# Altium PCB PX4FMUv1.6.PcbDoc (part 1 of 2)
Units mil, origin at the board's own origin, x right, y up, seen from the top; angles counter-clockwise.
Board outline 1968.5 x 1417.32 mil, 4 copper layers (Top, Route2, Route15, Bottom), stack 57.482 mil thick; 118 components, 107 nets, 504 pads, 254 vias.
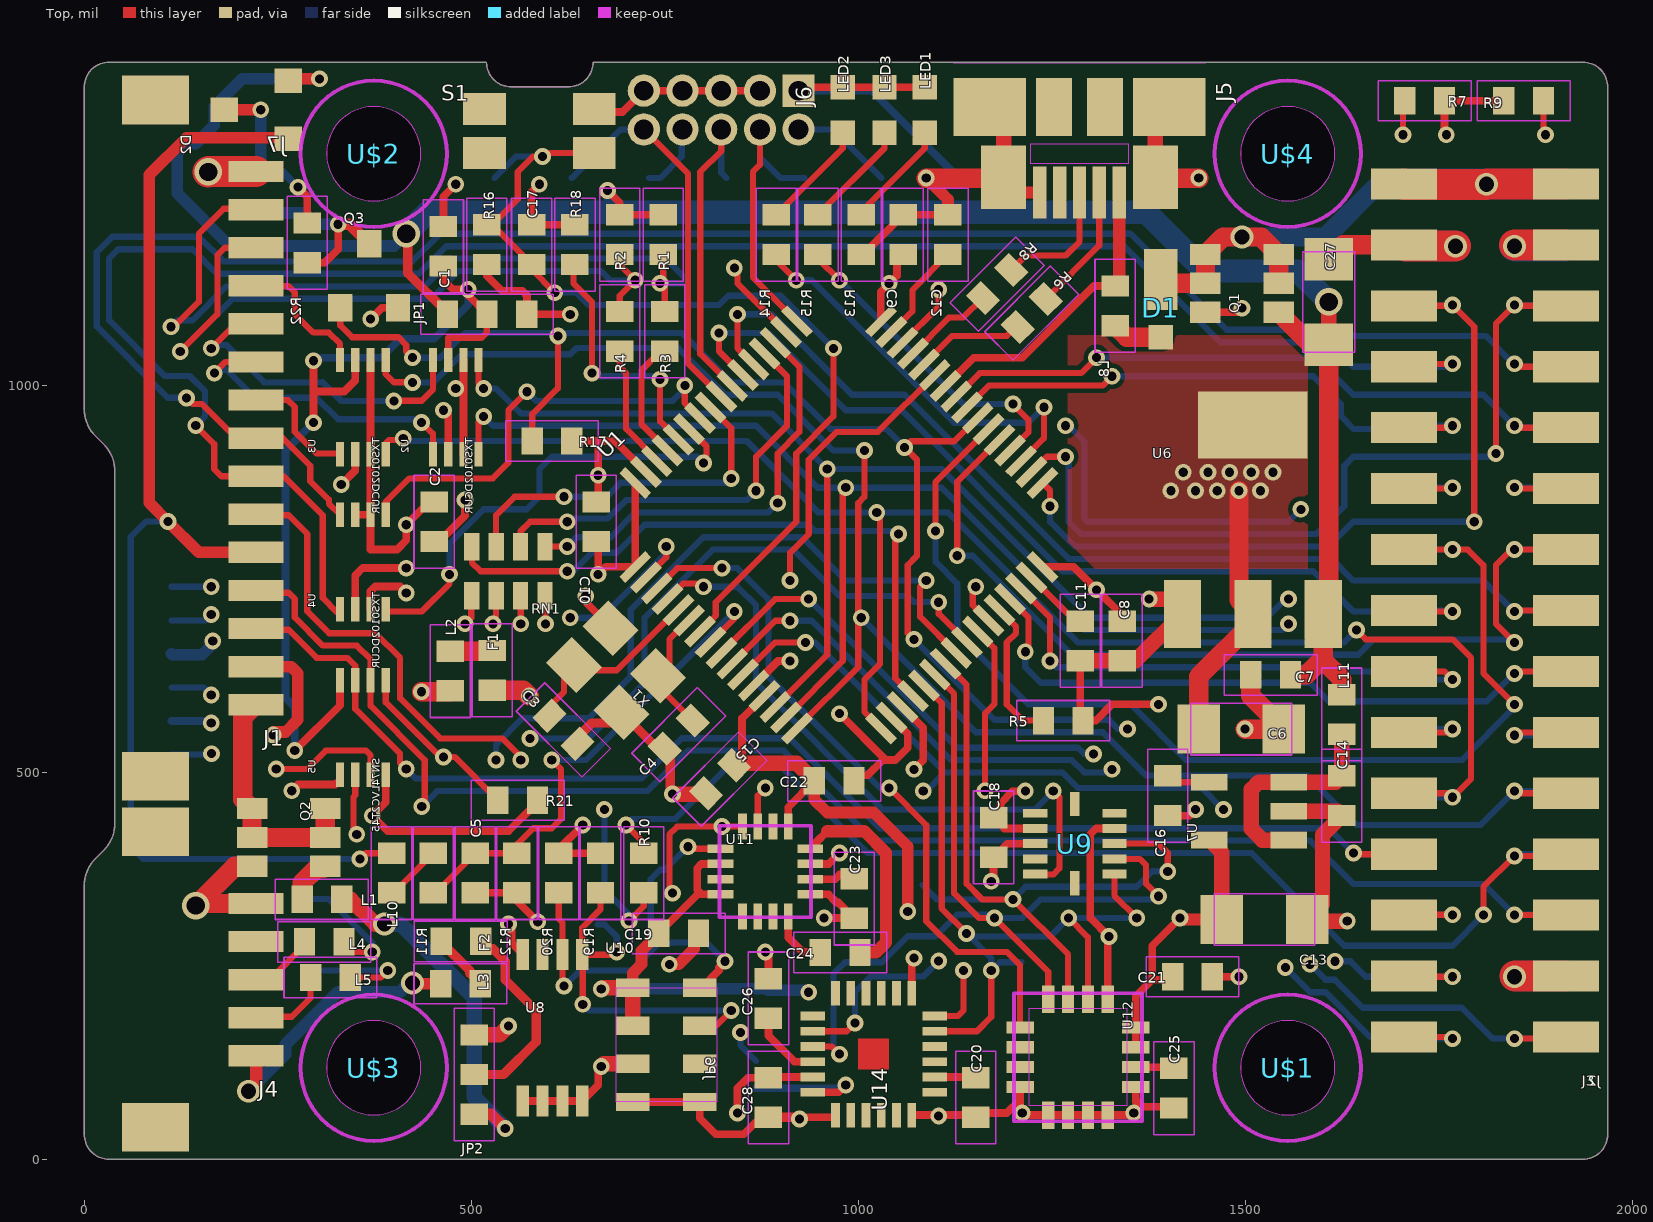
[diagram p0: Top view]
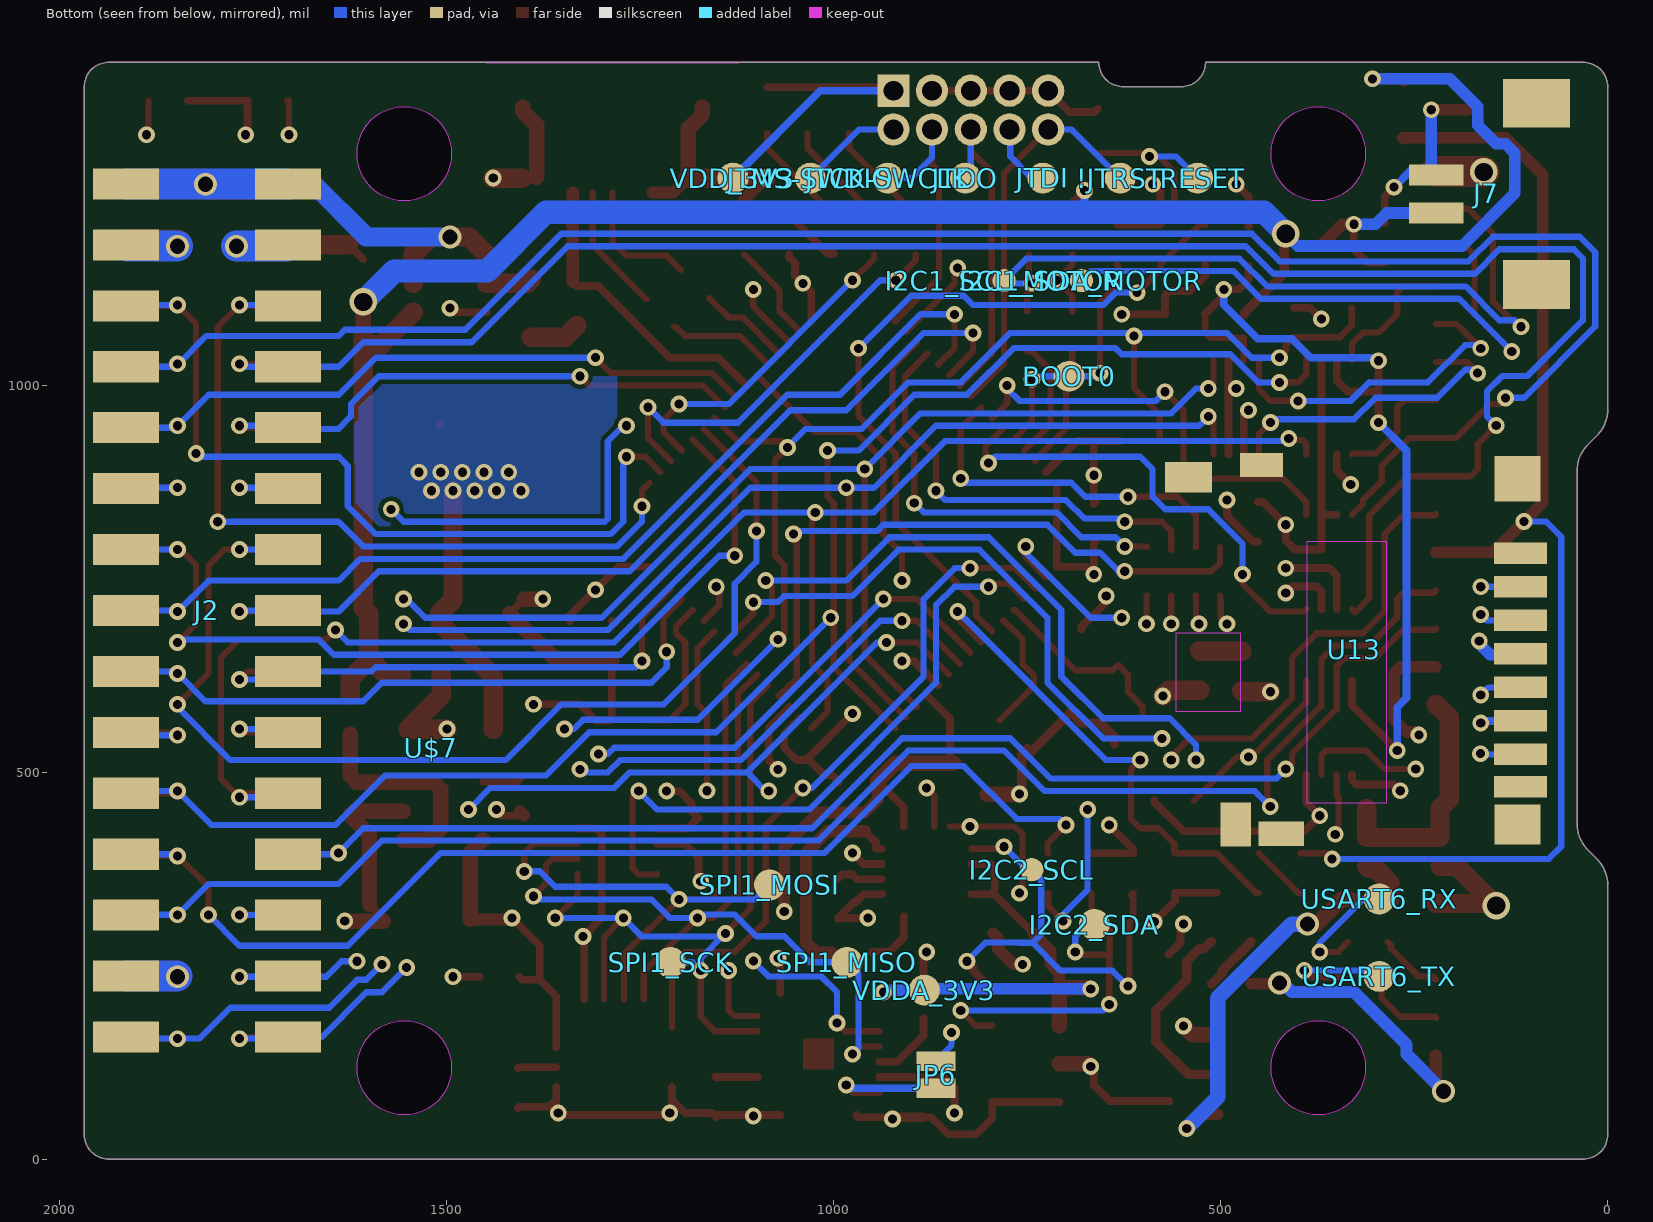
[diagram p1: Bottom view, seen from below]
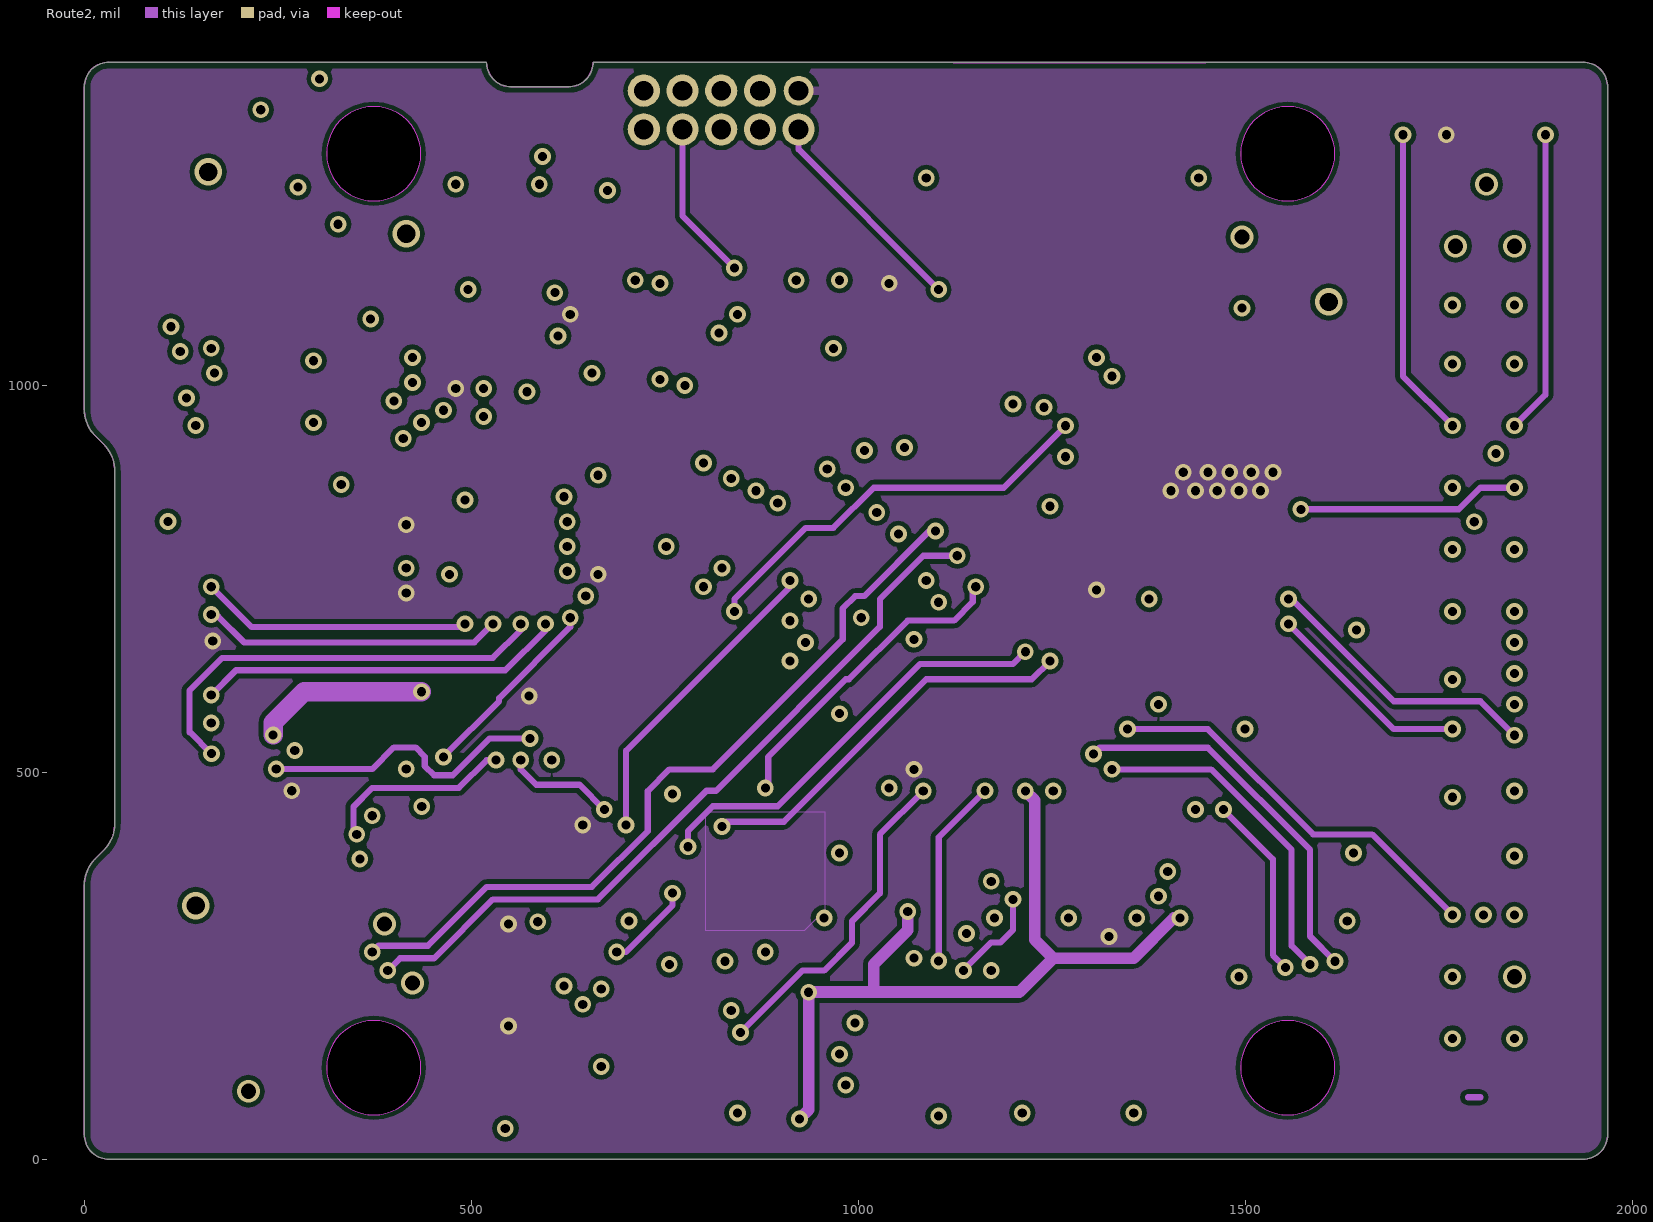
[diagram p2: Route2]
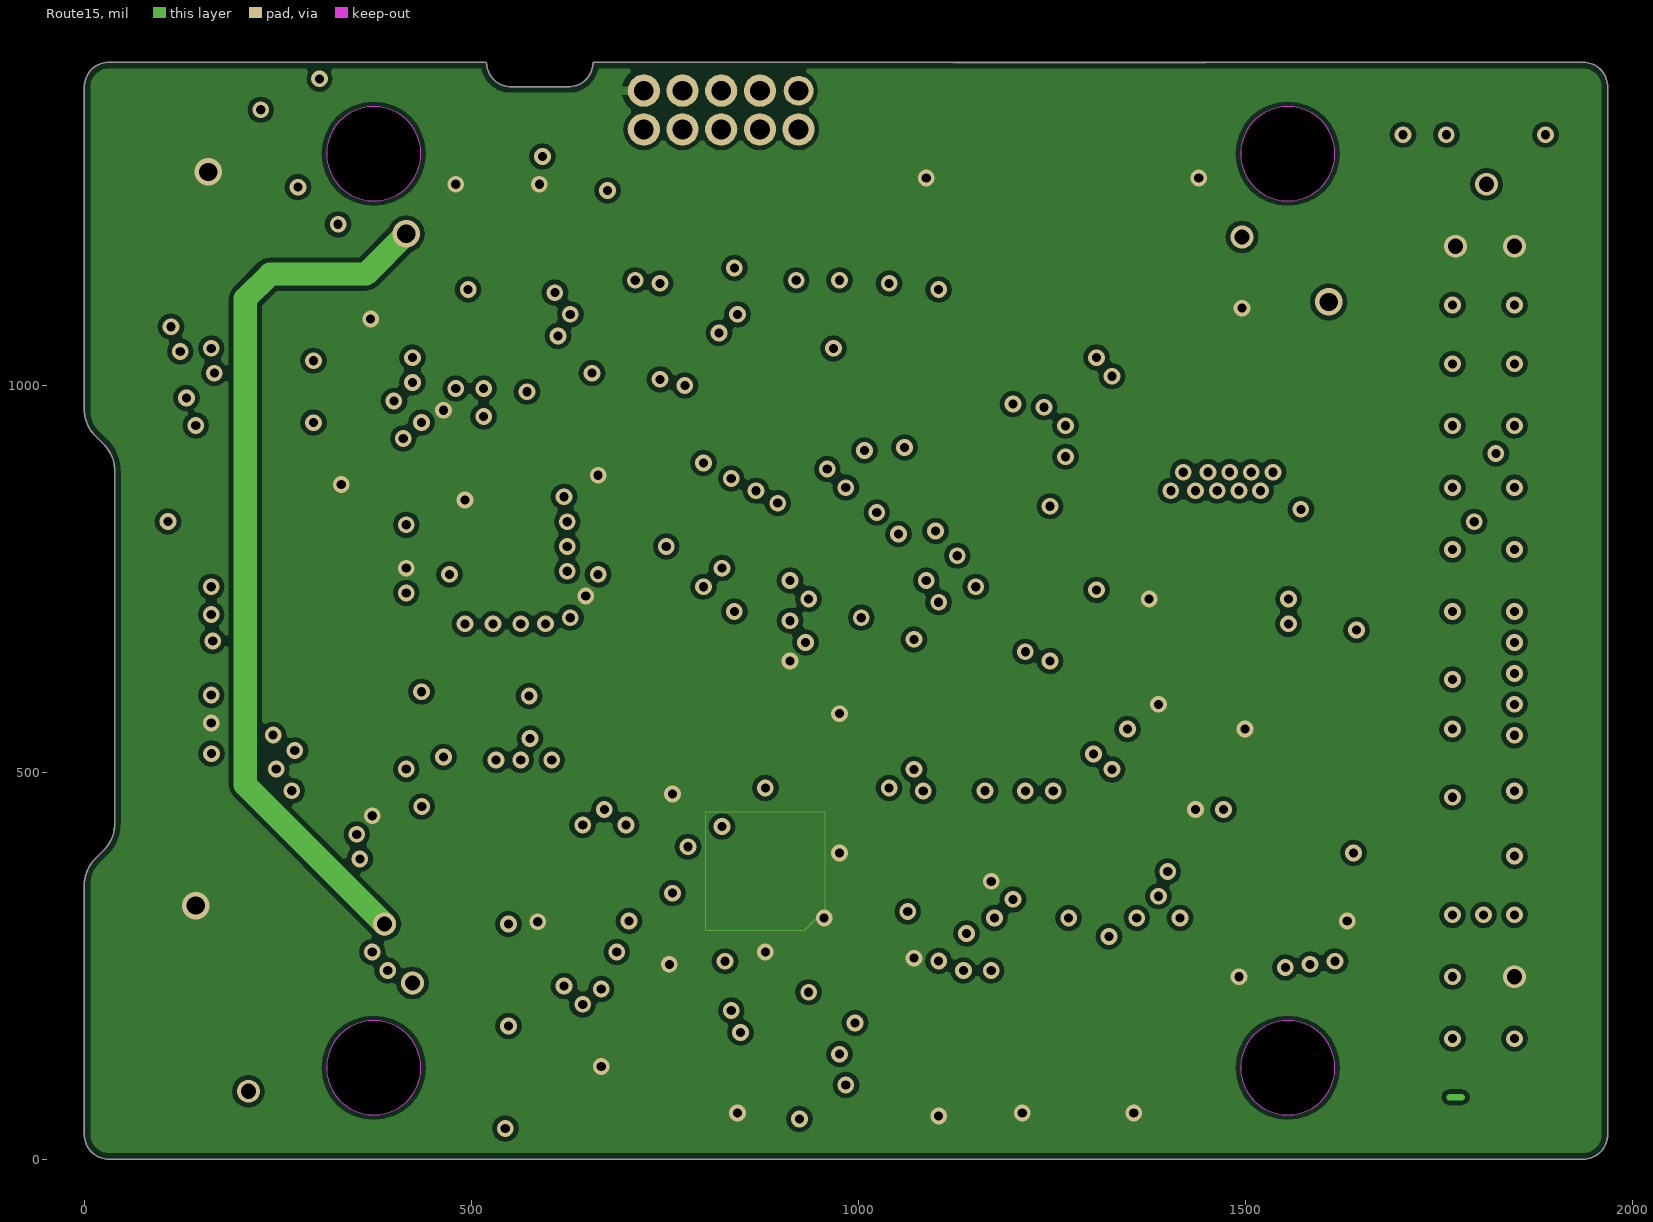
[diagram p3: Route15]

## Layer stack, top to bottom
Top Solder: solder mask 0.4, Solder Resist, Dk 3.5
Top: signal copper 1.378
Dielectric 1: core 19.685, FR-4, Dk 4.8
Route2: signal copper 1.378
Dielectric2: core 19.685, FR-4, Dk 4.8
Route15: signal copper 1.378
Dielectric3: dielectric 12.6, FR-4, Dk 4.8
Bottom: signal copper 1.378
Bottom Solder: solder mask 0.4, Solder Resist, Dk 3.5

## Board outline
39.37,432.96 39.37,889.88 ccw(c-7.88,889.88) 25.53,923.29 13.84,934.98 cw(c47.25,968.39) 0,968.39 0,1385.83 cw(c31.5,1385.83) 31.5,1417.32 519.68,1417.32 ccw(c551.17,1417.33) 551.18,1385.83 625.98,1385.83 ccw(c625.99,1417.33) 657.48,1417.32 1937.01,1417.32 cw(c1937.01,1385.83) 1968.5,1385.83 1968.5,31.5 cw(c1937.01,31.5) 1937.01,0 31.5,0 cw(c31.5,31.5) 0,31.5 0,354.44 cw(c47.25,354.44) 13.84,387.85 25.53,399.55 ccw(c-7.88,432.96)
cut-out: 1122.61,1416.46 1449.39,1416.46
cut-out: 1555.12,57.09 ccw(c1555.12,118.11) 1616.14,118.11 ccw(c1555.12,118.11) 1555.12,179.13 ccw(c1555.12,118.11) 1494.1,118.11 ccw(c1555.12,118.11)
cut-out: 374.02,1238.18 ccw(c374.02,1299.21) 435.05,1299.21 ccw(c374.02,1299.21) 374.02,1360.23 ccw(c374.02,1299.21) 313,1299.21 ccw(c374.02,1299.21)
cut-out: 1555.12,1238.18 ccw(c1555.12,1299.21) 1616.14,1299.21 ccw(c1555.12,1299.21) 1555.12,1360.23 ccw(c1555.12,1299.21) 1494.1,1299.21 ccw(c1555.12,1299.21)
cut-out: 374.02,57.09 ccw(c374.02,118.11) 435.05,118.11 ccw(c374.02,118.11) 374.02,179.13 ccw(c374.02,118.11) 313,118.11 ccw(c374.02,118.11)

## Design rules (kind name [scope] priority, off if disabled: settings)
BoardOutlineClearance mdCopperDimension [All] p1: gap=10 ignorepadtopadclearanceinfootprint=FALSE except(0: Arc-SplitContinuation Track-SplitContinuation SMDPad-SplitContinuation THPad-SplitContinuation Via-SplitContinuation Fill-SplitContinuation Poly-SplitContinuation Region-SplitContinuation Text-SplitContinuation; 7.87: Poly-OutlineEdge Poly-CavityEdge Poly-CutoutEdge Poly-SplitBarrior)
Clearance "Clearance (Same Net)" [All] p1: gap=5.91 ignorepadtopadclearanceinfootprint=FALSE
Clearance Clearance_for_NetClass_power [InNetClass('power') vs InNetClass('power')] p2: gap=8 ignorepadtopadclearanceinfootprint=FALSE
Clearance [All] p3: gap=5.91 ignorepadtopadclearanceinfootprint=FALSE
HoleSize HoleSize_For_NetClass_power [InNetClass('power')] p1: absolutevalues=TRUE maxlimit=11.81 minlimit=11.81 maxpercent=80.000 minpercent=20.000
HoleSize [All] p2: absolutevalues=TRUE maxlimit=100000 minlimit=11.81 maxpercent=80.000 minpercent=20.000
HoleToHoleClearance mdDrill [All] p1: gap=7.87 allowstackedmicrovias=TRUE
MinimumSolderMaskSliver [All] p1 off: minsoldermaskwidth=10
PasteMaskExpansion Expansion_SMDPaste_OFF [InPadClass('SMDPaste_OFF')] p1: expansion=0
PasteMaskExpansion mlMinCreamFrame [All] p2: expansion=-1
PolygonConnect PolygonConnect_For_PolygonThermal_ON_Width118100_Gap80000 [InPolygonClass('PolygonThermal_ON_Width118100_Gap80000') vs Not IsVia] p1: connectstyle=Relief reliefconductorwidth=11.81 reliefentries=4 polygonreliefangle="90 Angle" airgapwidth=8
PolygonConnect PolygonConnect_For_PolygonThermal_ON_Width100000_Gap80000 [InPolygonClass('PolygonThermal_ON_Width100000_Gap80000') vs Not IsVia] p2: connectstyle=Relief reliefconductorwidth=10 reliefentries=4 polygonreliefangle="90 Angle" airgapwidth=8
PolygonConnect PolygonConnect_For_PolygonThermal_ON_Width80000_Gap80000 [InPolygonClass('PolygonThermal_ON_Width80000_Gap80000') vs Not IsVia] p3: connectstyle=Relief reliefconductorwidth=8 reliefentries=4 polygonreliefangle="90 Angle" airgapwidth=8
PolygonConnect PolygonConnect_For_PolygonThermal_OFF [InPolygonClass('PolygonThermal_OFF')] p4: connectstyle=Direct reliefconductorwidth=10 reliefentries=4 polygonreliefangle="90 Angle" airgapwidth=10
PolygonConnect ThermalVias [IsVia] p5: connectstyle=Direct reliefconductorwidth=10 reliefentries=4 polygonreliefangle="90 Angle" airgapwidth=10
PolygonConnect [All] p6: connectstyle=Relief reliefconductorwidth=10 reliefentries=4 polygonreliefangle="90 Angle" airgapwidth=10
RoutingVias [All] p1: holewidth=11.81 width=21.65 viastyle="Through Hole" minholewidth=11.81 minwidth=21.65 maxholewidth=100 maxwidth=100
SolderMaskExpansion Expansion_SMDSolder_OFF [InPadClass('SMDSolder_OFF')] p1: expansion=0 istentingtop=FALSE
SolderMaskExpansion mlMinStopFrame [All] p2: expansion=1 istentingtop=FALSE
Width Width_For_NetClass_power [InNetClass('power')] p1: maxlimit=10 minlimit=10 preferedwidth=10
Width [All] p2: maxlimit=10000 minlimit=5.91 preferedwidth=5.91
26 further rules are at their usual default settings.

## Classes and differential pairs
polygon class PolygonThermal_ON_Width100000_Gap80000: Polygon_1_Net_GND Polygon_1_Net_POLY1 Polygon_1_Net_POLY2 Polygon_1_Net_VDD_3V3
polygon class PolygonThermal_ON_Width80000_Gap80000: Polygon_3_Net_VDD_3V3
polygon class PolygonThermal_OFF: Polygon_2_Net_VDD_3V3
pad class SMDSolder_OFF: RN1-1 RN1-2 RN1-3 RN1-4 RN1-5 RN1-6 RN1-7 RN1-8
pad class SMDPaste_OFF: !JTRST-P$1 !RESET-P$1 BOOT0-P$1 I2C1_SCL_MOTOR-P$1 I2C1_SDA_MOTOR-P$1 I2C2_SCL-P$1 I2C2_SDA-P$1 JP1-3 JP2-3 JP6-1 JP6-2 JTCK-SWCLK-P$1 JTDI-P$1 JTDO-P$1 JTMS-SWDIO-P$1 SPI1_MISO-P$1 SPI1_MOSI-P$1 SPI1_SCK-P$1 USART6_RX-P$1 USART6_TX-P$1 VDD_3V3-P$1 VDDA_3V3-P$1
net class power: GND N$23 N$24 N$27 N$100 VBUS VDD_3V3 VDD_3V3_ANALOG VDD_5V VDD_5V_IN VDD_IO

## Components (designator, comment, footprint, x,y, rotation, side; value= is the part's Value field where it differs from the comment)
!JTRST "" PAD.04X.04 629.92,1267.65 r225 bottom
!RESET "" PAD.04X.04 529.92,1267.65 r225 bottom
BOOT0 "" PAD.04X.04 696,1011.69 r180 bottom
C1 "0u1" 0402-CAP 464,1179.69 r90 top
C2 "0u1" 0402-CAP 452,823.68 r270 top
C3 "8p" 0402-CAP 619.07,554.76 r315 top
C4 "8p" 0402-CAP 768.07,548.61 r45 top
C5 "0u1" 0402-CAP 505,369.69 r270 top
C6 "10u" EIA3216 1495,555.68 r180 top
C7 "0u1" 0402-CAP 1533,625.68 r180 top
C8 "0u1" 0402-CAP 1341,669.68 r270 top
C9 "0u1" 0402-CAP 1058,1194.69 r90 top
C10 "0u1" 0402-CAP 661.39,823.68 r90 top
C11 "2u2" 0402-CAP 1287,669.68 r270 top
C12 "2u2" 0402-CAP 1116,1194.69 r90 top
C13 "10u" EIA3216 1525,309.69 r180 top
C14 "0u1" 0402-CAP 1625,469.69 r270 top
C15 "0u1" 0402-CAP 821.32,491.01 r225 top
C16 "470p" 0402-CAP 1400,469.69 r270 top
C17 "0u1" 0402-CAP 578,1181.69 r270 top
C18 "0u1" 0402-CAP 1175,415.69 r270 top
C19 "0u1" 0402-CAP 768,291.69 r0 top
C20 "0u01" 0402-CAP 1152,79.69 r270 top
C21 "0u1" 0402-CAP 1432,235.69 r0 top
C22 "0u1" 0402-CAP 969,488.69 r0 top
C23 "4u7" 0402-CAP 995,336.69 r270 top
C24 "0u22" 0402-CAP 976.69,267 r0 top
C25 "0u01" 0402-CAP 1408,91.69 r270 top
C26 "2u2" 0402-CAP 884,207.69 r90 top
C27 "10u" EIA3216 1608,1107.69 r270 top
C28 "2u2" 0402-CAP 884,79.69 r90 top
D1 "MSS1P4-M3" MICROSMP 1391,1087.69 r270 top
D2 "BAT54C" SOT23-3 224,1356 r90 top
F1 "500mA" 0402-PTC 527.24,631.65 r90 top
F2 "200mA" 0402-PTC 486.62,281.29 r180 top
I2C1_SCL_MOTOR "" PAD.03X.03 779.95,1135.31 r180 bottom
I2C1_SDA_MOTOR "" PAD.03X.03 679.95,1135.31 r180 bottom
I2C2_SCL "" PAD.03X.03 744.22,374.02 r180 bottom
I2C2_SDA "" PAD.04X.04 663.39,303.15 r180 bottom
J1 "DF13-15P-1.25H" DF13A-15P-1.25H 92,931.69 r90 top
J2 "HEADER_2X15-REV" HEADER_2MM_2X15_REVERSE 1810,708.98 r270 bottom
J3 "HEADER_2X15" HEADER_2MM_2X15 1810,708.98 r90 top
J4 "DF13-5P-1.25H" DF13A-5P-1.25H 92,232 r90 top
J5 "47346-0001" MOLEX-47346-0001 1286,1359.37 r270 top
J6 "" FTSH-105-01-XXX-DV 923,1380.69 r180 top
J7 "DF13-2P-1.25H" DF13A-2P-1.25H 91.69,1248 r270 bottom
JP1 "0R" SJ_3_0603_PASTE1&2 546,1091.69 r180 top
JP2 "0R" SJ_3_0603_PASTE1&2 504,83.69 r90 top
JP6 "JUMPER-2" SJ_2 868,91.69 r270 bottom
JTCK-SWCLK "" PAD.04X.04 930.32,1267.65 r225 bottom
JTDI "" PAD.04X.04 729.92,1267.65 r225 bottom
JTDO "" PAD.04X.04 829.92,1267.65 r225 bottom
JTMS-SWDIO "" PAD.04X.04 1030.32,1267.65 r225 bottom
L1 "FERRITE" 0402-IND 307,335.69 r180 top
L2 "FERRITE" 0402-IND 473,630.68 r270 top
L3 "FERRITE" 0402-IND 486,226.69 r180 top
L4 "BLM15HD102SN1" 0402-IND 310,280.69 r180 top
L5 "BLM15HD102SN1" 0402-IND 318,234.69 r180 top
L8 "FERRITE" 0402-IND 1332,1102.69 r90 top
L10 "BLM15HD102SN1" 0402-IND 397,369.69 r90 top
L11 "FERRITE" 0402-IND 1625,574.68 r270 top
LED1 "GREEN" LED-0603 1086,1355.69 r180 top
LED2 "AMBER" LED-0603 980,1355.69 r180 top
LED3 "BLUE" LED-0603 1034,1355.69 r180 top
Q1 "NTGS4111P" TSOP-6@1 1496,1131.69 r270 top
Q2 "NTGS4111P" TSOP-6@1 264,415.69 r270 top
Q3 "ZXMS6004FFTA" SOT23-3 368,1139.69 r0 top
R1 "1K5" 0402-RES 748,1194.69 r90 top
R2 "1K5" 0402-RES 692,1194.69 r90 top
R3 "100" 0402-RES 750,1069.69 r90 top
R4 "100" 0402-RES 692,1069.69 r90 top
R5 "10K" 0402-RES 1265,566.68 r0 top
R6 "22R" 0402-RES 1224.26,1093.32 r225 top
R7 "1K5" 0402-RES 1732,1367.69 r0 top
R8 "22R" 0402-RES 1179.53,1130.73 r225 top
R9 "1K5" 0402-RES 1860,1367.69 r180 top
R10 "1K0" 0402-RES 723,369.69 r270 top
R11 "47K/0.1%" 0402-RES 451,369.69 r90 top
R12 "10K/0.1%" 0402-RES 559,369.69 r90 top
R13 "270R" 0402-RES 1004,1194.69 r90 top
R14 "270R" 0402-RES 894,1194.69 r90 top
R15 "82R" 0402-RES 948,1194.69 r90 top
R16 "10K" 0402-RES 520,1181.69 r270 top
R17 "10K" 0402-RES 604.32,928 r180 top
R18 "10K" 0402-RES 634,1181.69 r270 top
R19 "1K5" 0402-RES 667,369.69 r90 top
R20 "1K5" 0402-RES 613,369.69 r90 top
R21 "10K" 0402-RES 560,463.69 r180 top
R22 "10K" 0402-RES 288,1184 r90 top
RN1 "CTS742C083" CTS742C083 548,759.68 r180 top
S1 "RESET" EVQP7J01K 588,1328.69 r180 top
SPI1_MISO "" PAD.04X.04 982.99,254.33 r225 bottom
SPI1_MOSI "" PAD.04X.04 1082.99,354.33 r180 bottom
SPI1_SCK "" PAD.04X.04 1210.99,254.33 r225 bottom
U1 "STM32F405RGT6" TQFP64 975,819.68 r45 top
U2 "TXS0102DCUR" TI-DCU 480,971.69 r0 top
U3 "TXS0102DCUR" TI-DCU 360,971.69 r0 top
U4 "TXS0102DCUR" TI-DCU 360,771.68 r0 top
U5 "SN74LVC2T45" TI-DCU 360,557.68 r0 top
U6 "LD1117AS33" SOT-223 1510,826.68 r0 top
U7 "MIC5207" SOT23-5 1505,449.69 r90 top
U8 "128KBit EEPROM" MSOP-8 605,169.69 r0 top
U9 "" LGA12 1280,407.69 r0 top
U10 "MS5611-01BA" MS5611-01BA 752,147.69 r0 top
U11 "HMC5883L" HMC5883L-MAN 880,371.69 r0 top
U12 "L3GD20" L3G4200DH-MAN 1284,131.69 r270 top
U13 "" AMPHENOL_114-00841-68 152,479.69 r90 bottom
U14 "MPU-6000" QFN-24 1020,135.69 r270 top
U$1 "" MOUNT-HOLE3.1 1555.12,118.11 r0 top
U$2 "" MOUNT-HOLE3.1 374.02,1299.21 r0 top
U$3 "" MOUNT-HOLE3.1 374.02,118.11 r0 top
U$4 "" MOUNT-HOLE3.1 1555.12,1299.21 r0 top
U$7 "" OSHW-LOGO-S 1520,531.68 r180 bottom
USART6_RX "" PAD.04X.04 295.28,336.22 r180 bottom
USART6_TX "" PAD.04X.04 295.28,236.22 r180 bottom
VDD_3V3 "" PAD.04X.04 1130.32,1267.65 r225 bottom
VDDA_3V3 "" PAD.04X.04 882.99,218.33 r180 bottom
X1 "24 MHz 3.2x2.5mm 8-10pf" OSCILLATOR-3.2X2.5 687,631.68 r135 top

## Footprints (in the part's own frame and the unit in brackets; to place one, negate y for a bottom-side part, rotate by r counter-clockwise, add the part's x,y. Pads: shape width x height; smd on the part's side, far side on the other; paste and mask are expansions set on the pad)
0402-CAP [mm] "0402-CAP"
  rect 0.7x0.9 smd: 1(-0.65,0) 2(0.65,0)
  Top keep-out lines w0.051: -1.524,0.66 -1.524,-0.66 1.524,-0.66 1.524,0.66 -1.524,0.66
0402-IND [mm] "0402-IND"
  rect 0.7x0.9 smd: 1(-0.65,0) 2(0.65,0)
  Top keep-out lines w0.051: 1.524,0.66 1.524,-0.66 -1.524,-0.66 -1.524,0.66 1.524,0.66
0402-PTC [mm] "0402-PTC"
  rect 0.7x0.9 smd: 1(-0.65,0) 2(0.65,0)
  Top keep-out lines w0.051: -1.524,0.66 -1.524,-0.66 1.524,-0.66 1.524,0.66 -1.524,0.66
0402-RES [mm] "0402-RES"
  rect 0.7x0.9 smd: 1(-0.65,0) 2(0.65,0)
  Top keep-out lines w0.051: -1.524,0.66 -1.524,-0.66 1.524,-0.66 1.524,0.66 -1.524,0.66
AMPHENOL_114-00841-68 [mm] "AMPHENOL_114-00841-68"
  rect 0.7x1.75 smd: P$1(7.7,-1) P$2(6.6,-1) P$3(5.5,-1) P$4(4.4,-1) P$5(3.3,-1) P$6(2.2,-1) P$7(1.1,-1) P$8(0.04,-1)
  rect 1.5x1.5 smd: P$9(10.15,-0.9)
  rect 1.3x1.5 smd: P$10(-1.2,-0.9)
  rect 0.8x1.5 smd: P$11(-1.5,6.85)
  rect 1.45x1 smd: P$12(-1.2,8.35)
  rect 0.8x1.4 smd: P$13(10.6,7.5)
  rect 1x1.55 smd: P$14(10.2,9.9)
  Top keep-out region: -0.5,3.4 -0.5,6 8.1,6 8.1,3.4
  Top keep-out region: 2.5,8.2 2.5,10.3 5.1,10.3 5.1,8.2
CTS742C083 [mil] "CTS742C083"
  rect 19.69x35.43 smd mask+0: 1(-47.24,-31.5) 2(-15.75,-31.5) 3(15.75,-31.5) 4(47.24,-31.5) 5(47.24,31.5) 6(15.75,31.5) 7(-15.75,31.5) 8(-47.24,31.5)
DF13A-2P-1.25H [mil] "DF13A-2P-1.25H"
  rect 27.56x70.87 smd: 1(-23.82,-129.92) 2(25.39,-129.92)
  rect 62.99x86.61 smd: S1(117.91,0) S2(-116.34,0)
DF13A-5P-1.25H [mil] "DF13A-5P-1.25H"
  rect 27.56x70.87 smd: 1(-98.43,-129.92) 2(-49.21,-129.92) 3(0,-129.92) 4(49.21,-129.92) 5(98.43,-129.92)
  rect 62.99x86.61 smd: S1(190.94,0) S2(-190.94,0)
DF13A-15P-1.25H [mm] "DF13A-15P-1.25H"
  rect 0.7x1.8 smd: 1(-8.75,-3.3) 2(-7.5,-3.3) 3(-6.25,-3.3) 4(-5,-3.3) 5(-3.75,-3.3) 6(-2.5,-3.3) 7(-1.25,-3.3) 8(0,-3.3) 9(1.25,-3.3) 10(2.5,-3.3) 11(3.75,-3.3) 12(5,-3.3) 13(6.25,-3.3) 14(7.5,-3.3) 15(8.75,-3.3)
  rect 1.6x2.2 smd: S1(11.1,0) S2(-11.1,0)
EIA3216 [mil] "EIA3216"
  rect 55.12x62.99 smd: A(55.12,0) C(-55.12,0)
  Top keep-out lines w1.97: 64.96,33.46 64.96,-33.46 -64.96,-33.46 -64.96,33.46 64.96,33.46
EVQP7J01K [mil] "EVQP7J01K"
  rect 55.12x41.34 smd: A1(-70.87,28.54) A2(70.87,28.54) B3(-70.87,-28.54) B4(70.87,-28.54)
FTSH-105-01-XXX-DV [mm] "FTSH-105-01-XXX-DV"
  rect 1.06x1.06 / inner round 0.979 / far side rect 1.06x1.06 hole 0.65: 1(0,0)
  round 1.06 hole 0.65: 2(0,1.27) 3(1.27,0) 4(1.27,1.27) 5(2.54,0) 6(2.54,1.27) 7(3.81,0) 8(3.81,1.27) 9(5.08,0) 10(5.08,1.27)
HEADER_2MM_2X15 [mm] "HEADER_2MM_2X15"
  rect 1.02x2.16 smd: 1(14,-2.655) 2(14,2.655) 3(12,-2.655) 4(12,2.655) 5(10,-2.655) 6(10,2.655) 7(8,-2.655) 8(8,2.655) 9(6,-2.655) 10(6,2.655) 11(4,-2.655) 12(4,2.655) 13(2,-2.655) 14(2,2.655) 15(0,-2.655) 16(0,2.655) 17(-2,-2.655) 18(-2,2.655) 19(-4,-2.655) 20(-4,2.655) 21(-6,-2.655) 22(-6,2.655) 23(-8,-2.655) 24(-8,2.655) 25(-10,-2.655) 26(-10,2.655) 27(-12,-2.655) 28(-12,2.655) 29(-14,-2.655) 30(-14,2.655)
HEADER_2MM_2X15_REVERSE [mm] "HEADER_2MM_2X15_REVERSE"
  rect 1.02x2.16 smd: 1(-14,-2.655) 2(-14,2.655) 3(-12,-2.655) 4(-12,2.655) 5(-10,-2.655) 6(-10,2.655) 7(-8,-2.655) 8(-8,2.655) 9(-6,-2.655) 10(-6,2.655) 11(-4,-2.655) 12(-4,2.655) 13(-2,-2.655) 14(-2,2.655) 15(0,-2.655) 16(0,2.655) 17(2,-2.655) 18(2,2.655) 19(4,-2.655) 20(4,2.655) 21(6,-2.655) 22(6,2.655) 23(8,-2.655) 24(8,2.655) 25(10,-2.655) 26(10,2.655) 27(12,-2.655) 28(12,2.655) 29(14,-2.655) 30(14,2.655)
HMC5883L-MAN [mm] "HMC5883L-MAN"
  rect 0.85x0.285 smd: 1(-1.475,0.75) 2(-1.475,0.25) 3(-1.475,-0.25) 4(-1.475,-0.75) 9(1.475,-0.75) 10(1.475,-0.25) 11(1.475,0.25) 12(1.475,0.75)
  rect 0.285x0.85 smd: 5(-0.75,-1.475) 6(-0.25,-1.475) 7(0.25,-1.475) 8(0.75,-1.475) 13(0.75,1.475) 14(0.25,1.475) 15(-0.25,1.475) 16(-0.75,1.475)
  Top keep-out lines w0.127: -1.5,-1.5 -1.5,1.5 1.5,1.5 1.5,-1.5 -1.5,-1.5
L3G4200DH-MAN [mil] "L3G4200DH-MAN"
  rect 35.43x15.75 smd: 1(-74.8,38.39) 2(-74.8,12.8) 3(-74.8,-12.8) 4(-74.8,-38.39) 9(74.8,-38.39) 10(74.8,-12.8) 11(74.8,12.8) 12(74.8,38.39)
  rect 15.75x35.43 smd: 5(-38.39,-74.8) 6(-12.8,-74.8) 7(12.8,-74.8) 8(38.39,-74.8) 13(38.39,74.8) 14(12.8,74.8) 15(-12.8,74.8) 16(-38.39,74.8)
  Top keep-out region: -62.99,-62.99 -62.99,62.99 62.99,62.99 62.99,-62.99
  Top keep-out lines w5: 82.68,-82.68 -82.68,-82.68 -82.68,82.68 82.68,82.68 82.68,-82.68
LED-0603 [mil] "LED-0603"
  rect 31.5x31.5 smd: A(0,-29.53) C(0,29.53)
LGA12 [mil] "LGA12"
  rect 31.5x11.42 smd: 1(-51.18,39.37) 2(-51.18,19.69) 3(-51.18,0) 4(-51.18,-19.69) 5(-51.18,-39.37) 7(51.18,-39.37) 8(51.18,-19.69) 9(51.18,0) 10(51.18,19.69) 11(51.18,39.37)
  rect 12.6x31.5 smd: 6(0,-51.18) 12(0,51.18)
MICROSMP [mil] "MICROSMP"
  rect 31.5x31.5 smd: ANODE(25.59,0)
  rect 78.74x43.31 smd: CATHODE(-49.21,0)
MOLEX-47346-0001 [mm] "MOLEX-47346-0001"
  rect 1.7x0.44 smd: D+(2.8,0) D-(2.8,0.65) GND(2.8,-1.3) ID(2.8,-0.65) VBUS(2.8,1.3)
  rect 1.9x2.375 smd: GND1(0,2.95) GND4(0,-2.95)
  rect 2.1x1.475 smd: GND2(2.3,2.5) GND3(2.3,-2.5)
  rect 1.9x1.175 smd: GND5(0,-0.837) GND6(0,0.837)
  Top keep-out region: 1.2,-1.6 1.2,1.6 1.85,1.6 1.85,-1.6
MOUNT-HOLE3.1 [mil] "MOUNT-HOLE3.1"
  Top keep-out circle w5: c0,0 r94.49
MS5611-01BA [mil] "MS5611-01BA"
  rect 43.31x23.62 smd: 1(-43.31,73.82) 2(-43.31,24.61) 3(-43.31,-24.61) 4(-43.31,-73.82) 5(43.31,-73.82) 6(43.31,-24.61) 7(43.31,24.61) 8(43.31,73.82)
  Top keep-out region: -64.96,-73.82 -64.96,73.82 64.96,73.82 64.96,-73.82
MSOP-8 [mil] "MSOP-8"
  rect 15.75x40.16 smd: 1(-38.39,-94.49) 2(-12.8,-94.49) 3(12.8,-94.49) 4(38.39,-94.49) 5(38.39,94.49) 6(12.8,94.49) 7(-12.8,94.49) 8(-38.39,94.49)
OSCILLATOR-3.2X2.5 [mil] "OSCILLATOR-3.2X2.5"
  rect 55.12x47.24 smd: 1(-43.31,-33.46) 2(43.31,-33.46) 3(43.31,33.46) 4(-43.31,33.46)
OSHW-LOGO-S [mil] "OSHW-LOGO-S"
PAD.03X.03 [mil] "PAD.03X.03"
  rrect100% 30x30 smd paste+0: P$1(0,0)
PAD.04X.04 [mil] "PAD.04X.04"
  rrect100% 40x40 smd paste+0: P$1(0,0)
QFN-24 [mil] "QFN-24"
  rect 31.5x11.42 smd: 1(-78.74,49.21) 2(-78.74,29.53) 3(-78.74,9.84) 4(-78.74,-9.84) 5(-78.74,-29.53) 6(-78.74,-49.21) 13(78.74,-49.21) 14(78.74,-29.53) 15(78.74,-9.84) 16(78.74,9.84) 17(78.74,29.53) 18(78.74,49.21)
  rect 11.42x31.5 smd: 7(-49.21,-78.74) 8(-29.53,-78.74) 9(-9.84,-78.74) 10(9.84,-78.74) 11(29.53,-78.74) 12(49.21,-78.74) 19(49.21,78.74) 20(29.53,78.74) 21(9.84,78.74) 22(-9.84,78.74) 23(-29.53,78.74) 24(-49.21,78.74)
  Top region: -19.69,-19.69 -19.69,19.69 19.69,19.69 19.69,-19.69
SJ_2 [mil] "SJ_2"
  rect 25x50 smd paste+0: 1(-35,0) 2(0,0)
SJ_3_0603_PASTE1&2 [mm] "SJ_3_0603_PASTE1&2"
  rect 0.7x0.9 smd: 1(-0.65,0) 2(0.65,0)
  rect 0.7x0.9 smd paste+0: 3(1.95,0)
  Top keep-out lines w0.051: 2.824,0.66 2.824,-0.66 -1.524,-0.66 -1.524,0.66 2.824,0.66
SOT23-3 [mil] "SOT23-3"
  rect 31.5x35.43 smd: 1(-37.4,-39.37) 2(37.4,-39.37) 3(0,43.31)
SOT23-5 [mil] "SOT23-5"
  rect 21.65x47.24 smd: 1(-37.4,-51.19) 2(0,-51.19) 3(37.4,-51.19) 4(37.4,51.19) 5(-37.4,51.19)
SOT-223 [mil] "SOT-223"
  rect 48x88 smd: 1(-91,-122) 2(0,-122) 3(91,-122)
  rect 141.73x86.61 smd: 4(0,122.01)
TI-DCU [mil] "TI-DCU"
  rect 10.63x31.5 smd: 1(-29.53,-61.02) 2(-9.84,-61.02) 3(9.84,-61.02) 4(29.53,-61.02) 5(29.53,61.02) 6(9.84,61.02) 7(-9.84,61.02) 8(-29.53,61.02)
TQFP64 [mm] "TQFP64"
  rect 1.2x0.29 smd: 1(-5.7,3.75) 2(-5.7,3.25) 3(-5.7,2.75) 4(-5.7,2.25) 5(-5.7,1.75) 6(-5.7,1.25) 7(-5.7,0.75) 8(-5.7,0.25) 9(-5.7,-0.25) 10(-5.7,-0.75) 11(-5.7,-1.25) 12(-5.7,-1.75) 13(-5.7,-2.25) 14(-5.7,-2.75) 15(-5.7,-3.25) 16(-5.7,-3.75) 33(5.7,-3.75) 34(5.7,-3.25) 35(5.7,-2.75) 36(5.7,-2.25) 37(5.7,-1.75) 38(5.7,-1.25) 39(5.7,-0.75) 40(5.7,-0.25) 41(5.7,0.25) 42(5.7,0.75) 43(5.7,1.25) 44(5.7,1.75) 45(5.7,2.25) 46(5.7,2.75) 47(5.7,3.25) 48(5.7,3.75)
  rect 0.29x1.2 smd: 17(-3.75,-5.7) 18(-3.25,-5.7) 19(-2.75,-5.7) 20(-2.25,-5.7) 21(-1.75,-5.7) 22(-1.25,-5.7) 23(-0.75,-5.7) 24(-0.25,-5.7) 25(0.25,-5.7) 26(0.75,-5.7) 27(1.25,-5.7) 28(1.75,-5.7) 29(2.25,-5.7) 30(2.75,-5.7) 31(3.25,-5.7) 32(3.75,-5.7) 49(3.75,5.7) 50(3.25,5.7) 51(2.75,5.7) 52(2.25,5.7) 53(1.75,5.7) 54(1.25,5.7) 55(0.75,5.7) 56(0.25,5.7) 57(-0.25,5.7) 58(-0.75,5.7) 59(-1.25,5.7) 60(-1.75,5.7) 61(-2.25,5.7) 62(-2.75,5.7) 63(-3.25,5.7) 64(-3.75,5.7)
TSOP-6@1 [mm] "TSOP-6@1"
  rect 0.7x1 smd: 1(-0.95,-1.2) 2(0,-1.2) 3(0.95,-1.2) 4(0.95,1.2) 5(0,1.2) 6(-0.95,1.2)

## Part data
!JTRST !RESET BOOT0 I2C2_SDA JTCK-SWCLK JTDI JTDO JTMS-SWDIO SPI1_MISO SPI1_MOSI SPI1_SCK USART6_RX USART6_TX VDD_3V3 VDDA_3V3: library part PAD.04X.04, PackageName=PAD.04X.04
C1 C2 C3 C4 C5 C7 C8 C9 C10 C11 C12 C14 C15 C16 C17 C18 C19 C20 C21 C22 C23 C24 C25 C26 C28: library part 0402-CAP, PackageName=0402-CAP
C6 C13 C27: library part EIA3216, PackageName=EIA3216
D1: library part MICROSMP, PackageName=MICROSMP
D2 Q3: library part SOT23-3, PackageName=SOT23-3
F1 F2: library part 0402-PTC, PackageName=0402-PTC
I2C1_SCL_MOTOR I2C1_SDA_MOTOR I2C2_SCL: library part PAD.03X.03, PackageName=PAD.03X.03
J1: library part DF13A-15P-1.25H, PackageName=DF13A-15P-1.25H
J2: library part HEADER_2MM_2X15_REVERSE, PackageName=HEADER_2MM_2X15_REVERSE
J3: library part HEADER_2MM_2X15, PackageName=HEADER_2MM_2X15
J4: library part DF13A-5P-1.25H, PackageName=DF13A-5P-1.25H
J5: library part MOLEX-47346-0001, PackageName=MOLEX-47346-0001
J6: library part FTSH-105-01-XXX-DV, PackageName=FTSH-105-01-XXX-DV
J7: library part DF13A-2P-1.25H, PackageName=DF13A-2P-1.25H
JP1 JP2: library part SJ_3_0603_PASTE1&2, PackageName=SJ_3_0603_PASTE1&2
JP6: library part SJ_2, PackageName=SJ_2
L1 L2 L3 L4 L5 L8 L10 L11: library part 0402-IND, PackageName=0402-IND
LED1 LED2 LED3: library part LED-0603, PackageName=LED-0603
Q1 Q2: library part TSOP-6@1, PackageName=TSOP-6@1
R1 R2 R3 R4 R5 R6 R7 R8 R9 R10 R11 R12 R13 R14 R15 R16 R17 R18 R19 R20 R21 R22: library part 0402-RES, PackageName=0402-RES
S1: library part EVQP7J01K, PackageName=EVQP7J01K
U1: library part TQFP64, PackageName=TQFP64
U2 U3 U4 U5: library part TI-DCU, PackageName=TI-DCU
U6: library part SOT-223, PackageName=SOT-223
U7: library part SOT23-5, PackageName=SOT23-5
U8: library part MSOP-8, PackageName=MSOP-8
U9: library part LGA12, PackageName=LGA12
U11: library part HMC5883L-MAN, PackageName=HMC5883L-MAN
U12: library part L3G4200DH-MAN, PackageName=L3G4200DH-MAN
U13: library part AMPHENOL_114-00841-68, PackageName=AMPHENOL_114-00841-68
U14: library part QFN-24, PackageName=QFN-24
U$1 U$2 U$3 U$4: library part MOUNT-HOLE3.1, PackageName=MOUNT-HOLE3.1
U$7: library part OSHW-LOGO-S, PackageName=OSHW-LOGO-S
X1: library part OSCILLATOR-3.2X2.5, PackageName=OSCILLATOR-3.2X2.5
RN1: PackageName=CTS742C083
U10: PackageName=MS5611-01BA

## Free pads (board coordinates)
  round 122.05 hole 122.05 unplated: MH1(374.02,118.11) MH1(374.02,1299.21) MH1(1555.12,118.11) MH1(1555.12,1299.21)

## Via types
v1: diameter 21.65/21.65/21.65/21.65 (per signal layer), hole 11.81, Top to Bottom, 242 vias
v2: diameter 29.54/29.54/29.54/29.54 (per signal layer), hole 19.69, Top to Bottom, 8 vias
v3: diameter 35.43/35.43/35.43/35.43 (per signal layer), hole 23.62, Top to Bottom, 4 vias

## Nets (pads, with @x,y where several pads share a name; then routed paths per layer and width w, separated by ;. In a path a pad name is that pad's centre, name@x,y a point inside that pad or via, vN(x,y) a via of type N, cw(c..) or ccw(c..) an arc to the next point about the centre after c; other vN are vias at no path point)
!JTRST: !JTRST.P$1 J6.10 U1.56 | length 506.1
  Top w8: J6.10@723,1330.69 780,1273.69 780,1028.6 U1.56@823.28,985.32
  Bottom w8: !JTRST.P$1@629.92,1267.65 692.95,1330.69 J6.10@723,1330.69
ACCEL_CS: U1.4 U9.5 | length 834.1
  Top w8: U1.4@753.68,723.63 773.73,743.68 796,743.68 v1(800,739.68) ; U9.5@1228.82,368.32 1229.45,367.69 1252,367.69 1260,375.69 1260,467.69 v1(1252,475.69)
  Bottom w8: v1(800,739.68) 844,739.68 868,715.68 868,615.68 1032,451.69 1228,451.69 v1(1252,475.69)
ADC123_IN10: C5.1 J2.11 J3.11 R11.1 R12.2 U1.8 | length 2039.2
  Top w8: R11.1@451,344.1 453.82,344.09 C5.1@505,395.28 R12.2@559,395.28 560,396.28 560,407.69 580,427.69 604,427.69 616,439.69 616,503.69 v1(604,515.68) ; U1.8@809.36,667.96 840,698.6 v1(840,707.68) ; v1(1848,867.69) 1849.23,866.46 J3.11@1914.53,866.46
  Route2 w8: v1(840,707.68) 840,723.68 932,815.68 968,815.68 1020,867.69 1188,867.69 v1(1268,947.69) ; v1(1572,839.69) 1776,839.69 1804,867.69 v1(1848,867.69)
  Bottom w8: v1(604,515.68) 648,515.68 v1(840,707.68) ; v1(1268,947.69) 1272,947.69 1292,927.69 1292,827.68 1296,823.68 1556,823.68 v1(1572,839.69) ; v1(1848,867.69) 1913.3,867.69 J2.11@1914.53,866.46
ADC123_IN11: J2.28 J3.28 U1.9 | length 1313.7
  Top w8: U1.9@823.28,654.04 892.92,723.68 v1(936,723.68) ; J3.28@1705.47,236.54 1704.62,235.69 v1(1768,235.69)
  Route2 w8: v1(1304,523.68) 1312,531.68 1452,531.68 1584,399.69 1584,287.69 v1(1616,255.69)
  Bottom w8: v1(936,723.68) 1128,531.68 1284,531.68 1292,523.68 v1(1304,523.68) ; v1(1616,255.69) 1636,255.69 1656,235.69 J2.28@1704.62,235.69 ; J2.28@1705.47,236.54 J2.28@1704.62,235.69 ; v1(1768,235.69) J2.28@1704.62,235.69
ADC123_IN12: J2.29 J3.29 U1.10 | length 1468.2
  Top w8: U1.10@837.2,640.12 892.76,695.68 v1(912,695.68) ; v1(1848,155.69) 1912.42,155.69 J3.29@1914.53,157.8
  Route2 w8: v1(1328,503.69) 1456,503.69 1560,399.69 1560,275.69 v1(1584,251.69)
  Bottom w8: v1(912,695.68) 940,695.68 1120,515.68 1276,515.68 1292,499.69 1324,499.69 v1(1328,503.69) ; v1(1584,251.69) 1604,231.69 1616,231.69 1652,195.69 1780,195.69 1820,155.69 v1(1848,155.69) 1912.42,155.69 J2.29@1914.53,157.8
ADC123_IN13: J2.30 J3.30 JP6.1 U1.11 | length 1794.5
  Top w8: U1.11@851.11,626.2 892.59,667.68 v1(932,667.68) ; J3.30@1705.47,157.8 1765.89,157.8 v1(1768,155.69)
  Route2 w8: v1(848,163.69) 928,243.69 956,243.69 992,279.69 992,307.69 1028,343.69 1028,419.69 v1(1084,475.69) ; v1(1472,451.69) 1536,387.69 1536,263.69 v1(1552,247.69)
  Bottom w8: v1(848,163.69) 848,146.69 JP6.1@868,126.69 ; v1(932,667.68) 944,667.68 1112,499.69 ; v1(1084,475.69) 1088,475.69 1112,499.69 ; v1(1472,451.69) 1444,479.69 1284,479.69 1264,499.69 1112,499.69 ; v1(1552,247.69) 1584,215.69 1604,215.69 1661.89,157.8 J2.30@1705.47,157.8 ; J2.30@1703.36,155.69 J2.30@1705.47,157.8 ; v1(1768,155.69) 1707.58,155.69 J2.30@1705.47,157.8
ALARM: J2.26 J3.26 Q3.1 R17.2 U1.39 | length 2344.5
  Top w8: Q3.1@330.6,1100.32 330.6,1077.4 346,1062 406,1062 416,1052 416,1043.69 v1(424,1035.69) ; R17.2@578.73,928 578.72,962.72 612,996 v1(612,1063.69) ; v1(1072,671.68) 1064,679.68 1064,767.68 1076,779.68 1076,903.69 v1(1060,919.69) 1068,927.69 1124,927.69 1153.8,957.48 U1.39@1154.56,957.48 ; J3.26@1705.47,315.28 1705.88,315.69 v1(1768,315.69)
  Route2 w8: v1(1348,555.68) 1452,555.68 1588,419.69 1664,419.69 v1(1768,315.69)
  Bottom w8: v1(424,1035.69) 460,1035.69 492,1067.69 v1@612,1067.69 ; v1(612,1063.69) v1@612,1067.69 ; v1(1060,919.69) 1036,943.69 964,943.69 904,1003.69 836,1003.69 772,1067.69 v1@612,1067.69 ; v1(1072,671.68) 1176,567.68 1324,567.68 1336,555.68 v1(1348,555.68) ; J2.26@1705.47,315.28 1767.59,315.28 v1(1768,315.69)
BOOT0: BOOT0.P$1 R18.2 U1.60 | length 330.3
  Top w8: R18.2@634,1156.1 632,1154.09 632,1131.69 656,1107.69 v1(656,1015.69) ; v1(744,1007.69) 744,953.24 U1.60@767.6,929.64
  Bottom w8: v1(656,1015.69) 660,1011.69 BOOT0.P$1@696,1011.69 740,1011.69 v1(744,1007.69)
CAN2_RX: J2.6 J3.6 U1.33 | length 1046.4
  Top w8: U1.33@1238.08,873.96 1248,864.04 v1(1248,843.69) ; J3.6@1705.47,1102.68 1766.99,1102.68 v1(1768,1103.69) 1796,1075.69 v1(1796,823.68)
  Bottom w8: v1(1248,843.69) 1248,823.68 1280,791.68 1608,791.68 1640,823.68 v1(1796,823.68) ; J2.6@1705.47,1102.68 1706.48,1103.69 v1(1768,1103.69)
CAN2_TX: J2.5 J3.5 U1.34 | length 1105.7
  Top w8: U1.34@1224.16,887.89 1243.95,907.69 v1(1268,907.69) ; v1(1824,911.69) 1824,1079.69 v1(1848,1103.69) 1849.01,1102.68 J3.5@1914.53,1102.68
  Bottom w8: v1(1268,907.69) 1272,903.69 1272,823.68 1288,807.68 1592,807.68 1628,843.69 1628,895.69 1640,907.69 1820,907.69 v1(1824,911.69) ; v1(1848,1103.69) 1913.52,1103.69 J2.5@1914.53,1102.68
GND: C1.2 C2.2 C3.2 C4.1 C5.2 C6.C C7.2 C8.2 C9.2 C10.2 C11.2 C12.2 C13.C C14.2 C15.2 C16.2 C17.1 C18.2 C19.2 C20.2 C21.2 C22.2 C23.2 C25.2 C26.2 C27.C C28.2 J1.15 J2.3 J2.4 J2.27 J3.3 J3.4 J3.27 J4.5 J5.GND J5.GND1 J5.GND2 J5.GND3 J5.GND4 J6.3 J6.5 J6.9 Q1.3 Q2.3 Q3.2 R5.2 R12.1 R13.1 R17.1 R18.1 R21.1 S1.B3 U1.12 U1.18 U1.63 U2.2 U3.2 U4.2 U5.4 U6.1 U7.2 U8.1 U8.2 U8.3 U8.4 U9.3 U10.3 U11.9 U11.11 U12.8 U12.9 U12.10 U12.11 U12.12 U12.13 U13.P$6 U14.1 U14.11 U14.18 X1.2 X1.4 | length 5454.1
  Top w10: v1(332,871.69) 350.16,889.84 U3.2@350.16,910.67 ; U4.2@350.16,710.66 350.16,754.16 360,764 415.69,764 v1(416,763.68) ; v1(370,1085.69) 384.63,1100.32 Q3.2@405.4,1100.32 ; U5.4@389.53,496.66 389.53,461.21 v1(372,443.69) 392,423.69 548,423.69 585.59,461.28 R21.1@585.59,463.69 ; C2.2@452,798.09 458.41,798.09 492,831.68 v1(492,851.69) ; v1(464,967.69) 470.16,961.53 U2.2@470.16,910.67 ; C1.2@464,1205.28 464,1243.69 v1(480,1259.69) ; C5.2@505,344.1 R12.1@559,344.1 559,333.69 v1(586,306.69) ; U8.1@566.61,75.2 U8.2@592.2,75.2 U8.3@617.8,75.2 U8.4@643.39,75.2 664,95.81 664,115.69 v1(668,119.69) ; v1(588,1259.69) 578,1249.69 C17.1@578,1207.28 R18.1@634,1207.28 ; R17.1@629.91,928 664,928 ; v1(648,727.68) 648,719.68 X1.2@680.04,687.65 ; S1.B3@658.87,1357.23 662.87,1353.23 695.54,1353.23 J6.9@723,1380.69 J6.5@823,1380.69 J6.3@873,1380.69 ; C10.2@661.39,849.27 664,846.67 v1(664,883.69) 664,928 ; U1.63@725.84,887.89 695.63,918.09 685.73,928 664,928 ; v1(844,59.69) 844,91.69 857.59,105.28 C28.2@884,105.28 883.12,106.16 U14.11@941.26,106.16 ; U1.12@865.04,612.28 896.44,643.68 v1(912,643.68) ; v1(880,267.69) 884,263.69 C26.2@884,233.28 ; U11.9@937.54,342.69 U11.9@938.07,342.16 961.53,342.16 972,331.69 974.41,331.69 C23.2@994.41,311.69 ; U11.11@938.07,381.53 961.84,381.53 v1(976,395.69) ; v1(956,311.69) C23.2@994.41,311.69 ; v1(976,575.68) 1036,515.68 ; C22.2@994.59,486.28 C22.2@994.59,488.69 1001.91,496 1012,496 1031.69,515.68 1036,515.68 ; C23.2@995,311.1 C23.2@994.41,311.69 ; R13.1@1000,1170.28 R13.1@1005.18,1170.28 ; R13.1@1004,1169.1 R13.1@1005.18,1170.28 ; U1.18@1043.21,570.52 1064,549.73 1064,531.68 1048,515.68 1036,515.68 ; U14.18@1069.21,56.94 1102.74,56.94 v1(1104,55.69) 1105.26,56.94 C20.2@1154.85,56.94 ; U14.1@1069.21,214.43 1069.21,256.9 v1(1072,259.69) ; C12.2@1116,1220.28 C9.2@1058,1220.28 1008,1170.28 R13.1@1005.18,1170.28 ; C20.2@1152,54.1 C20.2@1154.85,56.94 ; v1(1172,359) 1175,362 C18.2@1175,390.1 1192.59,407.69 U9.3@1228.82,407.69 ; J5.GND3@1187.57,1268.82 1187.57,1267.26 1188,1267.69 J5.GND3@1192,1267.69 ; C11.2@1287,644.09 1287,570.28 R5.2@1290.59,566.68 1307,566.68 1328,587.68 v1(1388,587.68) ; 1358.8,74.49 U12.13@1358.8,93.3 1358.8,76.88 1368,67.69 ; C16.2@1400,444.1 1400.41,443.69 1428,443.69 v1(1436,451.69) ; U6.1@1400,723.68 U6.1@1419,704.68 ; C25.2@1408,66.1 1406.41,67.69 1368,67.69 ; Q1.3@1448.76,1094.29 1490.6,1094.28 v1(1496,1099.69) ; C21.2@1457.59,235.69 v1(1492,235.69) ; C13.C@1582.12,307.69 C13.C@1580.12,309.69 C13.C@1600,329.57 ; C27.C@1608,1162.81 C27.C@1626.61,1181.42 ; C14.2@1619.41,449.69 C14.2@1625,444.1 ; J3.4@1705.47,1181.42 J3.4@1707.2,1179.69 ; v2(1848,235.69) v2@1848.85,236.54 ; v2(1848,1179.69) v2@1848,1181.42 ; C20.2@1154.85,56.94 1157.59,59.69 1192,59.69 1209.2,76.88 U12.8@1209.2,93.3 1209.2,62.49 v1(1212,59.69) 1214.8,56.88 U12.9@1245.61,56.89 U12.10@1271.2,56.89 U12.11@1296.8,56.89 U12.12@1322.39,56.89 1353.2,56.88 v1(1356,59.69) 1364,67.69 1368,67.69
  Top w12: C3.2@637.16,536.67 637.17,544.85 656,563.68 680.24,563.68 X1.4@693.97,577.4 748.84,522.51 C4.1@757.17,522.51 ; X1.2@680.03,685.96 X1.2@680.04,687.65 ; C4.1@749.98,530.52 757.17,523.31 C4.1@757.17,522.51 ; v1(760,471.69) 757.17,474.51 C4.1@757.17,522.51 ; C15.2@802,471.69 C15.2@803.23,472.92
  Top w15: v1(756,251.69) 768,251.69 788,271.69 788,286.09 C19.2@793.59,291.69 ; v1(1088,1267.69) 1107.69,1248 1108,1248 1116,1240 C12.2@1116,1220.28 ; J5.GND3@1187.57,1268.82 1207.26,1249.13 J5.GND@1234.82,1249.13 ; J5.GND2@1384.43,1268.82 1385.56,1267.69 J5.GND2@1402.98,1267.69 ; C16.2@1400,444.1 C16.2@1405.59,449.69
  Top w20: v1(668,119.69) 671.39,123.08 U10.3@708.69,123.08 ; v1(760,471.69) C15.2@802,471.69 ; J5.GND4@1169.86,1359.37 1169.86,1350.14 1188,1332 1188,1269.24 J5.GND3@1187.57,1268.82 ; C11.2@1287,644.09 C8.2@1341,644.09 1358.41,644.09 U6.1@1419,704.68 ; v1(1376,723.68) U6.1@1400,723.68 ; J5.GND2@1384.43,1268.82 1384,1269.24 1384,1336 1402.14,1354.14 J5.GND1@1402.14,1359.37 ; U7.2@1556.19,449.69 C14.2@1619.41,449.69 ; C13.C@1582.12,307.69 v1(1632,307.69) ; C13.C@1600,329.57 1600,419.09 C14.2@1625,444.1
  Top w25: Q2.3@216.76,378.29 194.6,378.28 v3(144,327.69) 146.74,330.43 J4.5@221.92,330.43 ; v1(1088,1267.69) J5.GND3@1188,1267.69 ; J5.GND2@1402.98,1267.69 v1(1440,1267.69) ; v1(1500,555.68) C6.C@1550.12,555.68 1507.41,598.39 C7.2@1507.41,625.68 ; C27.C@1626.61,1181.42 J3.4@1705.47,1181.42
  Top w40: v3(160,1275.69) 160.49,1276.17 J1.15@221.92,1276.18 ; J3.4@1707.2,1179.69 v2(1772,1179.69) ; v2@1848,1181.42 J3.3@1914.53,1181.42 ; v2@1848.85,236.54 J3.27@1914.53,236.54
  Bottom w10: U13.P$6@112.63,566.3 162.61,566.3 164,564.91 v1(164,563.68) ; v1(880,267.69) v1@884,263.69 ; J2.4@1705.47,1181.42 J2.4@1707.2,1179.69 ; v2(1848,235.69) v2@1848.85,236.54 ; J2.3@1912.8,1179.69 J2.3@1914.53,1181.42
  Bottom w40: J2.4@1707.2,1179.69 v2(1772,1179.69) ; v2(1848,1179.69) J2.3@1912.8,1179.69 ; v2@1848.85,236.54 J2.27@1914.53,236.54
GPIO1: U1.24 U5.2 | length 1202.9
  Top w8: U5.2@350.16,496.66 350.16,470.16 348,468 348,423.69 v1(352,419.69) ; v1(1088,747.68) 1080,739.68 1080,700.76 U1.24@1126.72,654.04
  Route2 w8: v1(352,419.69) 352,420 348,424 348,455.69 372,479.69 484,479.69 520,515.68 v1(532,515.68)
  Bottom w8: v1(532,515.68) 532,535.68 566,569.68 652,569.68 706,623.68 706,709.68 800,803.68 928,803.68 984,747.68 v1(1088,747.68)
GPIO2: U1.25 U5.3 | length 1314.5
  Top w8: v1(248,504) 288,504 312,528 364,528 369.84,522.16 U5.3@369.84,496.66 ; v1(1104,719.68) 1104,704.6 U1.25@1140.64,667.96
  Route2 w8: v1(248,504) 372,504 400,532 428,532 440,520 440,508 452,496 476,496 523.68,543.68 v1(576,543.68)
  Bottom w8: v1(576,543.68) 652,543.68 724,615.68 724,699.68 812,787.68 916,787.68 976,727.68 1064.32,727.68 1072,720 1104,720 v1(1104,719.68)
GPIO_DIR: R21.2 U1.2 U5.5 | length 691.6
  Top w8: U5.5@389.53,618.7 389.53,590.16 460,519.68 v1(464,519.68) 478.41,519.68 R21.2@534.41,463.69 ; U1.2@725.84,751.47 752,777.64 v1(752,791.68)
  Route2 w8: v1(464,519.68) 536,591.68 536,595.68 628,687.68 v1(628,699.68)
  Bottom w8: v1(628,699.68) 668,699.68 752,783.68 v1(752,791.68)
GPIO_EXT1: J1.3 J2.24 J3.24 U5.7 | length 1753.7
  Top w8: J1.3@221.92,685.63 223.54,684 264,684 300.32,647.68 340,647.68 350.16,637.53 U5.7@350.16,618.7 350.16,581.53 350.47,581.53 408,524 408,512 v1(416,504) ; v1(1640,395.69) 1641.67,394.02 J3.24@1705.47,394.02
  Bottom w8: v1(416,504) 428.32,491.69 719.68,491.69 772,544 911.69,544 1028,427.69 1608,427.69 v1(1640,395.69) 1641.67,394.02 J2.24@1705.47,394.02
GPIO_EXT2: J1.4 J2.25 J3.25 U5.6 | length 2083
  Top w8: J1.4@221.92,734.84 224.76,732 264,732 272,724 272,700 308.32,663.68 352,663.68 369.84,645.84 U5.6@369.84,618.7 369.84,585.84 440,515.68 440,459.69 v1(436,455.69) ; v1(1848,315.69) 1848.41,315.28 J3.25@1914.53,315.28
  Bottom w8: v1(436,455.69) 456,475.69 727.68,475.69 780,528 903.69,528 1020,411.69 1584,411.69 1640,355.69 1808,355.69 v1(1848,315.69) 1914.12,315.69 J2.25@1914.53,315.28
GYRO_CS: U1.3 U12.5 | length 904.5
  Top w8: U1.3@739.76,737.56 765.89,763.68 v1(824,763.68) ; v1(1040,479.69) 1088,431.69 1088,307.69 1128,267.69 1192,267.69 1209.2,250.49 U12.5@1209.2,170.08
  Bottom w8: v1(824,763.68) 844,763.68 884,723.68 884,623.68 1028,479.69 v1(1040,479.69)
I2C1_SCL: R3.1 U1.61 | length 158
  Top w8: R3.1@750,1044.1 744.41,1044.09 720,1019.69 720,949.41 U1.61@753.68,915.73
I2C1_SCL_EXT: I2C1_SCL_MOTOR.P$1 J1.14 R1.1 R3.2 | length 1056.5
  Top w8: v1(112,1075.69) 112.32,1076 116,1076 148,1108 148,1196 180,1228 220.88,1228 J1.14@221.92,1226.97 ; R1.1@748,1169.1 748,1135.69 v1(744,1131.69) 750,1125.69 R3.2@750,1095.28
  Bottom w8: v1(112,1075.69) 120.32,1084 140,1084 183.69,1127.69 440,1127.69 476,1163.69 751.57,1163.69 I2C1_SCL_MOTOR.P$1@779.95,1135.31 776.33,1131.69 v1(744,1131.69)
I2C1_SDA: R4.1 U1.62 | length 162.1
  Top w8: R4.1@692,1044.1 692,1023.69 700,1015.69 700,943.69 739.76,903.93 U1.62@739.76,901.8
I2C1_SDA_EXT: I2C1_SDA_MOTOR.P$1 J1.13 R2.1 R4.2 | length 924.9
  Top w8: v1(124,1043.69) 172,1091.69 172,1168 181.75,1177.75 J1.13@221.92,1177.75 ; R4.2@692,1095.28 692,1115.69 v1(712,1135.69) 692,1155.69 R2.1@692,1169.1
  Bottom w8: v1(124,1043.69) 192,1111.69 448,1111.69 484,1147.69 667.57,1147.69 I2C1_SDA_MOTOR.P$1@679.95,1135.31 711.62,1135.31 v1(712,1135.69)